# Altium PCB AUDIO-SMD_PJ-328-5A.pcbdoc
Units mm, origin at the board's own origin, x right, y up, seen from the top; angles counter-clockwise.
Board outline 22.8 x 32.91 mm, 2 copper layers (Top Layer, Bottom Layer); 1 components, 0 nets, 5 pads, 0 vias.
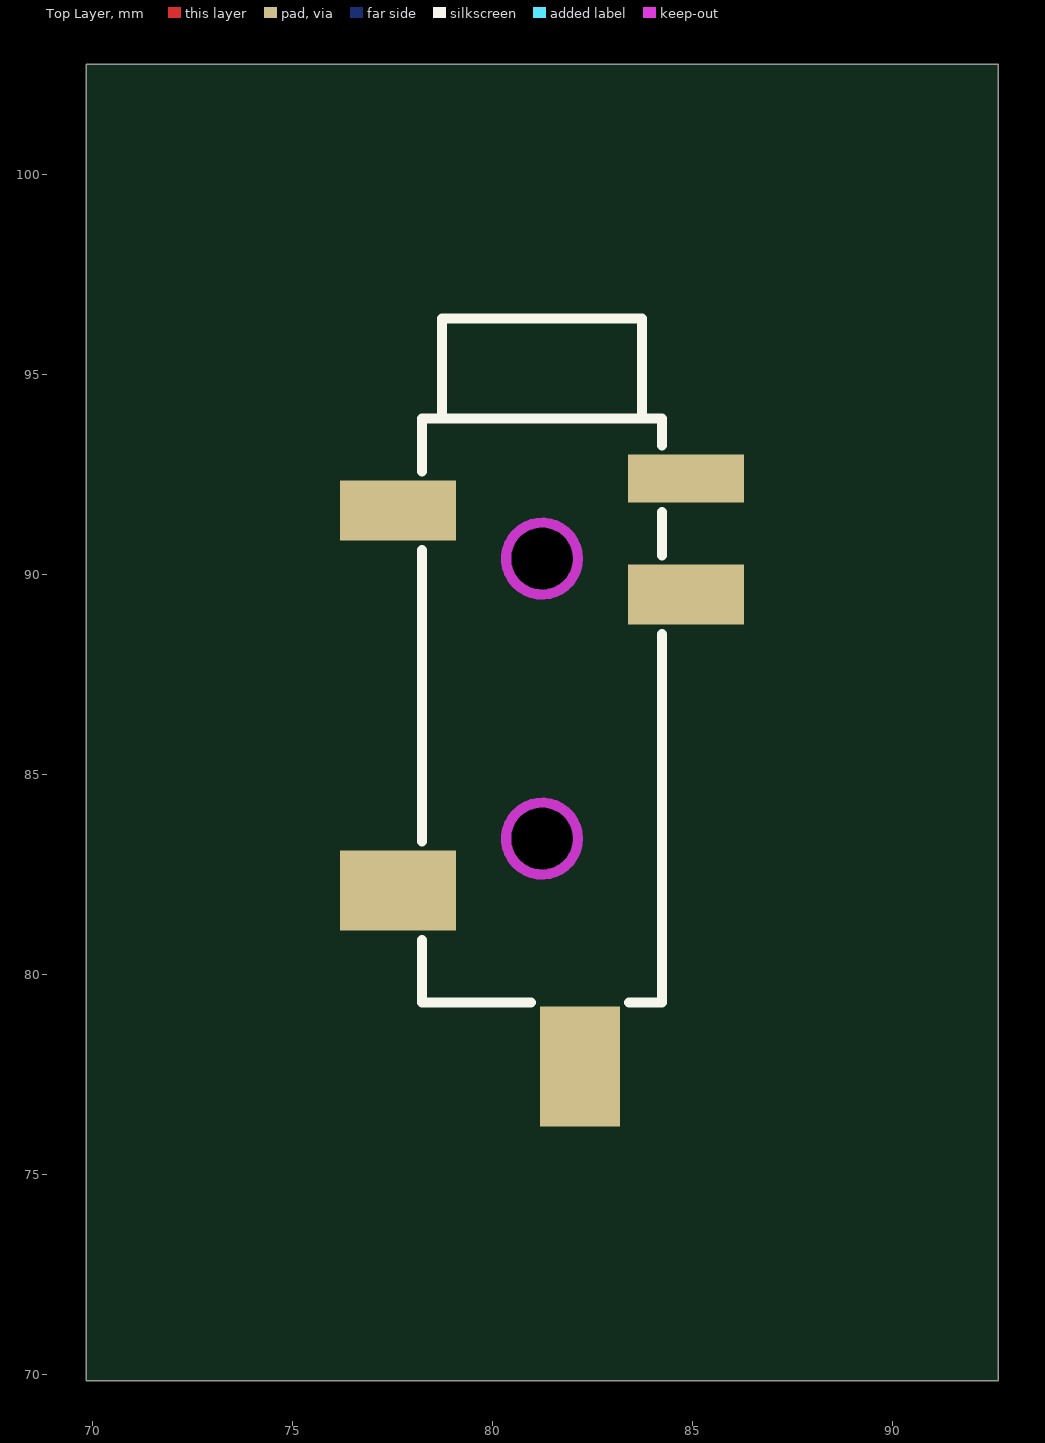
[diagram p0: Top Layer view]
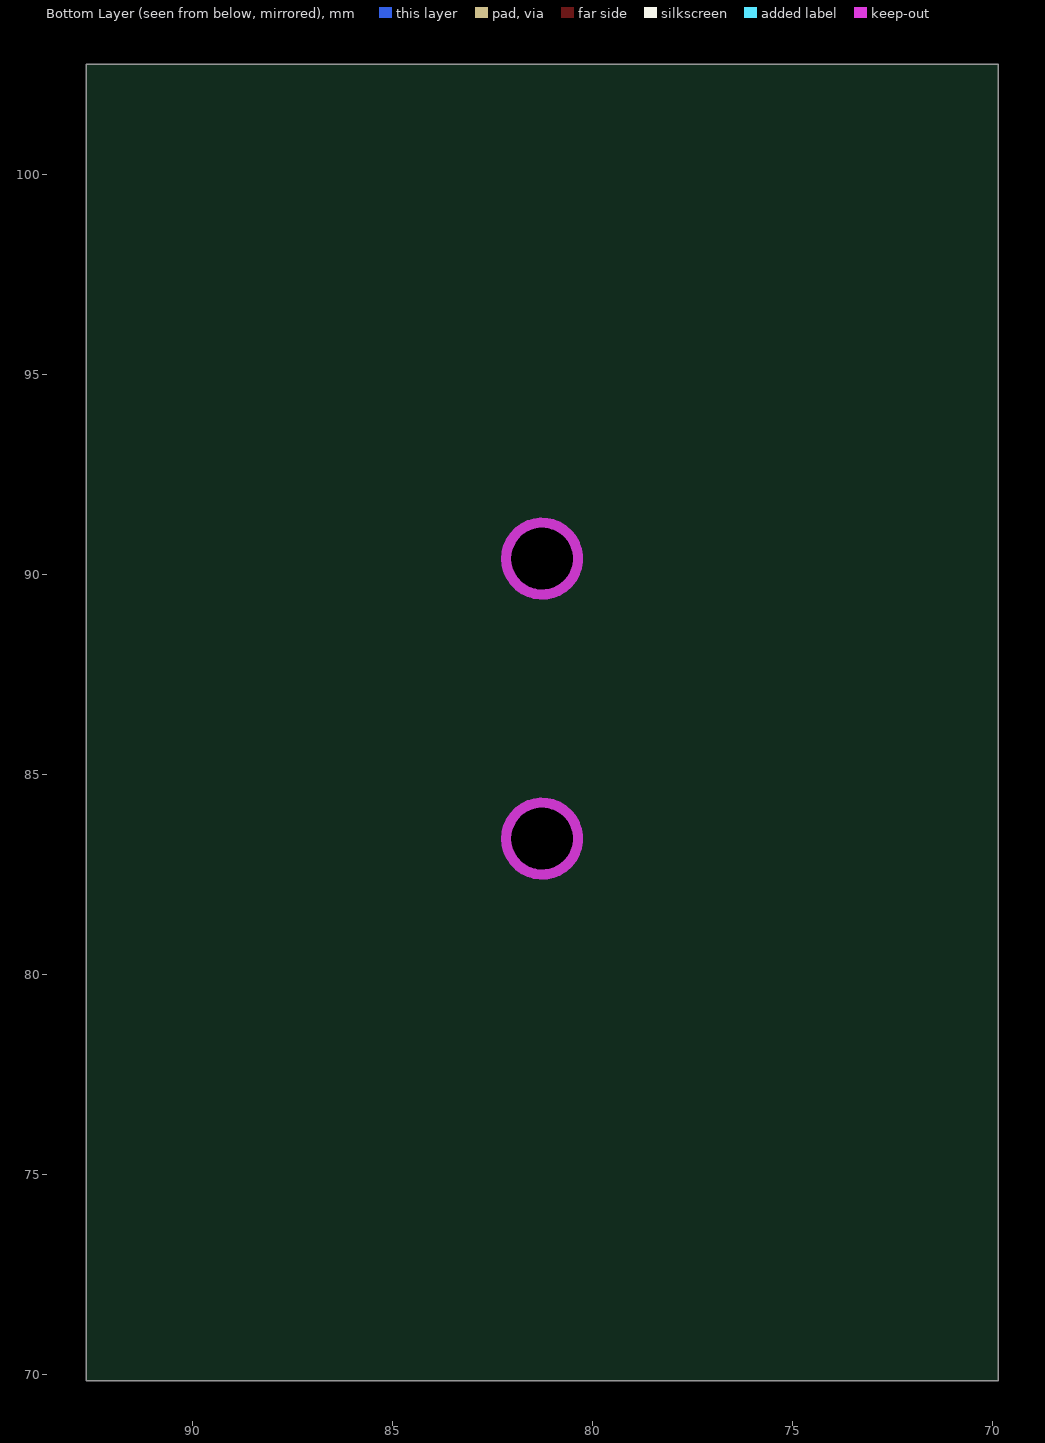
[diagram p1: Bottom Layer view, seen from below]

## Layer stack, top to bottom
Top Layer: signal copper (thickness not stored)
Dielectric: dielectric 0.32, FR-4, Dk 4.8
Bottom Layer: signal copper (thickness not stored)

## Board outline
92.65,69.85 69.85,69.85 69.85,102.763 92.65,102.763

## Components (designator, comment, footprint, x,y, rotation, side; value= is the part's Value field where it differs from the comment)
? "AUDIO-SMD_PJ-328-5A" AUDIO-SMD_PJ-328-5A 81.25,85.05 r0 top

## Footprints (in the part's own frame and the unit in brackets; to place one, negate y for a bottom-side part, rotate by r counter-clockwise, add the part's x,y. Pads: shape width x height; smd on the part's side, far side on the other; paste and mask are expansions set on the pad)
AUDIO-SMD_PJ-328-5A [mm]
  rect 2.9x1.2 smd: 3(3.6,7.35)
  rect 2.9x1.5 smd: 4(-3.6,6.55) 7(3.6,4.45)
  rect 2.9x2 smd: 5(-3.6,-2.95)
  rect 2x3 smd: 6(0.95,-7.35)
  Multi-Layer board cut-out: 0.9,5.35 0.811,5.741 0.561,6.054 0.2,6.228 -0.2,6.228 -0.561,6.054 -0.811,5.741 -0.9,5.35 -0.9,5.35 -0.78,4.9 -0.45,4.571 0,4.45 0.45,4.571 0.779,4.9 0.9,5.35
  Multi-Layer board cut-out: 0.9,-1.65 0.811,-1.259 0.561,-0.946 0.2,-0.772 -0.2,-0.772 -0.561,-0.946 -0.811,-1.259 -0.9,-1.65 -0.9,-1.65 -0.78,-2.1 -0.45,-2.429 0,-2.55 0.45,-2.429 0.779,-2.1 0.9,-1.65
  silkscreen extent -3,-5.75 3,11.35

## Nets (pads, with @x,y where several pads share a name; then routed paths per layer and width w, separated by ;. In a path a pad name is that pad's centre, name@x,y a point inside that pad or via, vN(x,y) a via of type N, cw(c..) or ccw(c..) an arc to the next point about the centre after c; other vN are vias at no path point)
pads on no net: ?.3 ?.4 ?.5 ?.6 ?.7

## Keep-outs
Multi-Layer:
  circle w0.254: c81.25,90.4 r0.9
  circle w0.254: c81.25,83.4 r0.9